# EAGLE board TCO v2 (EAGLE 7.2.0)
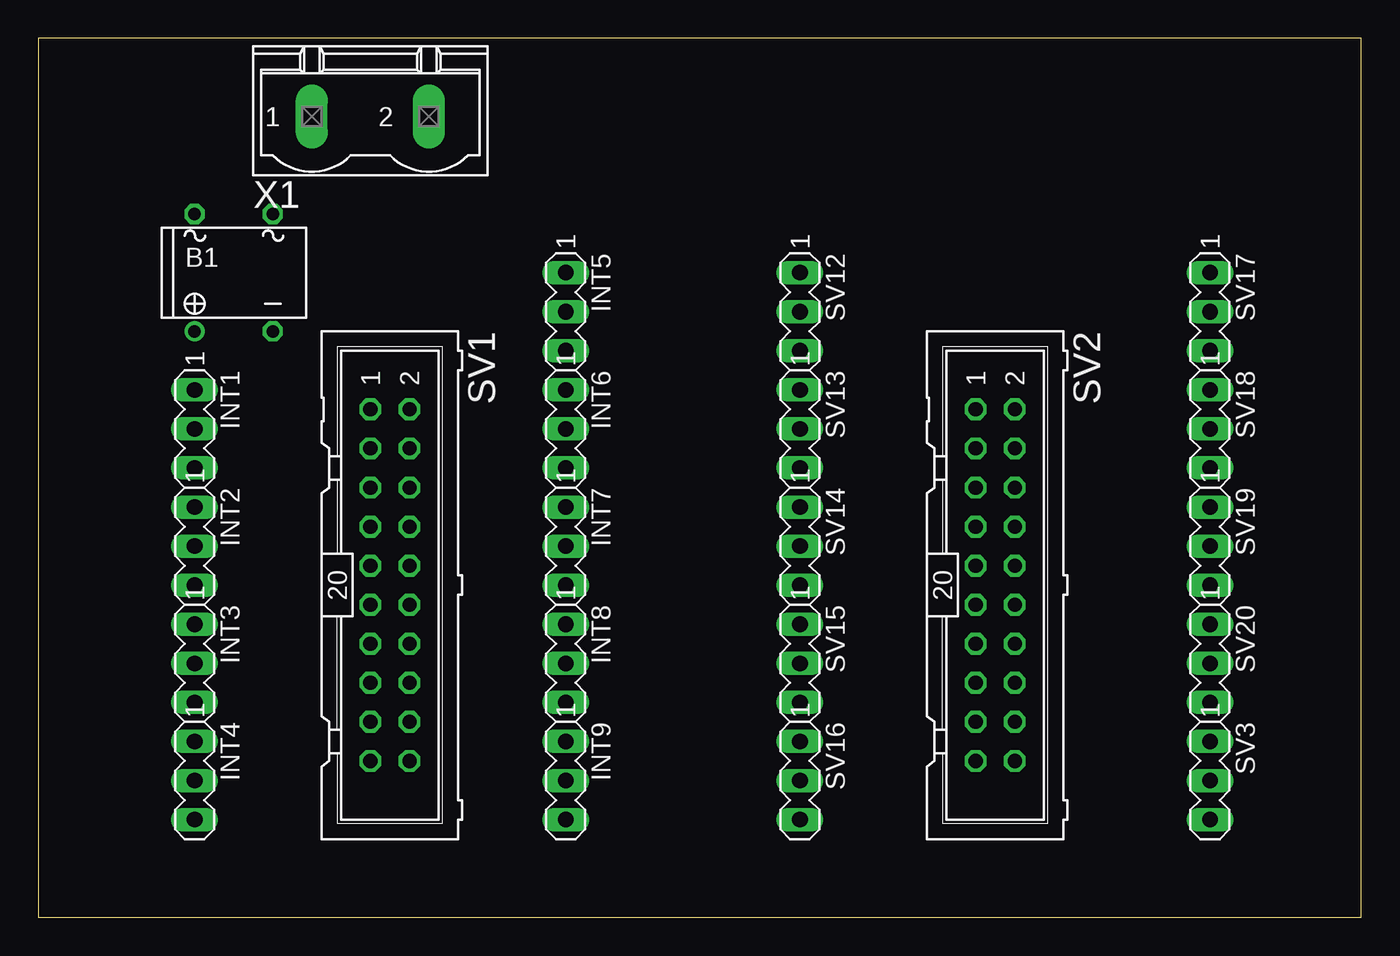
[diagram p0: board, top side]
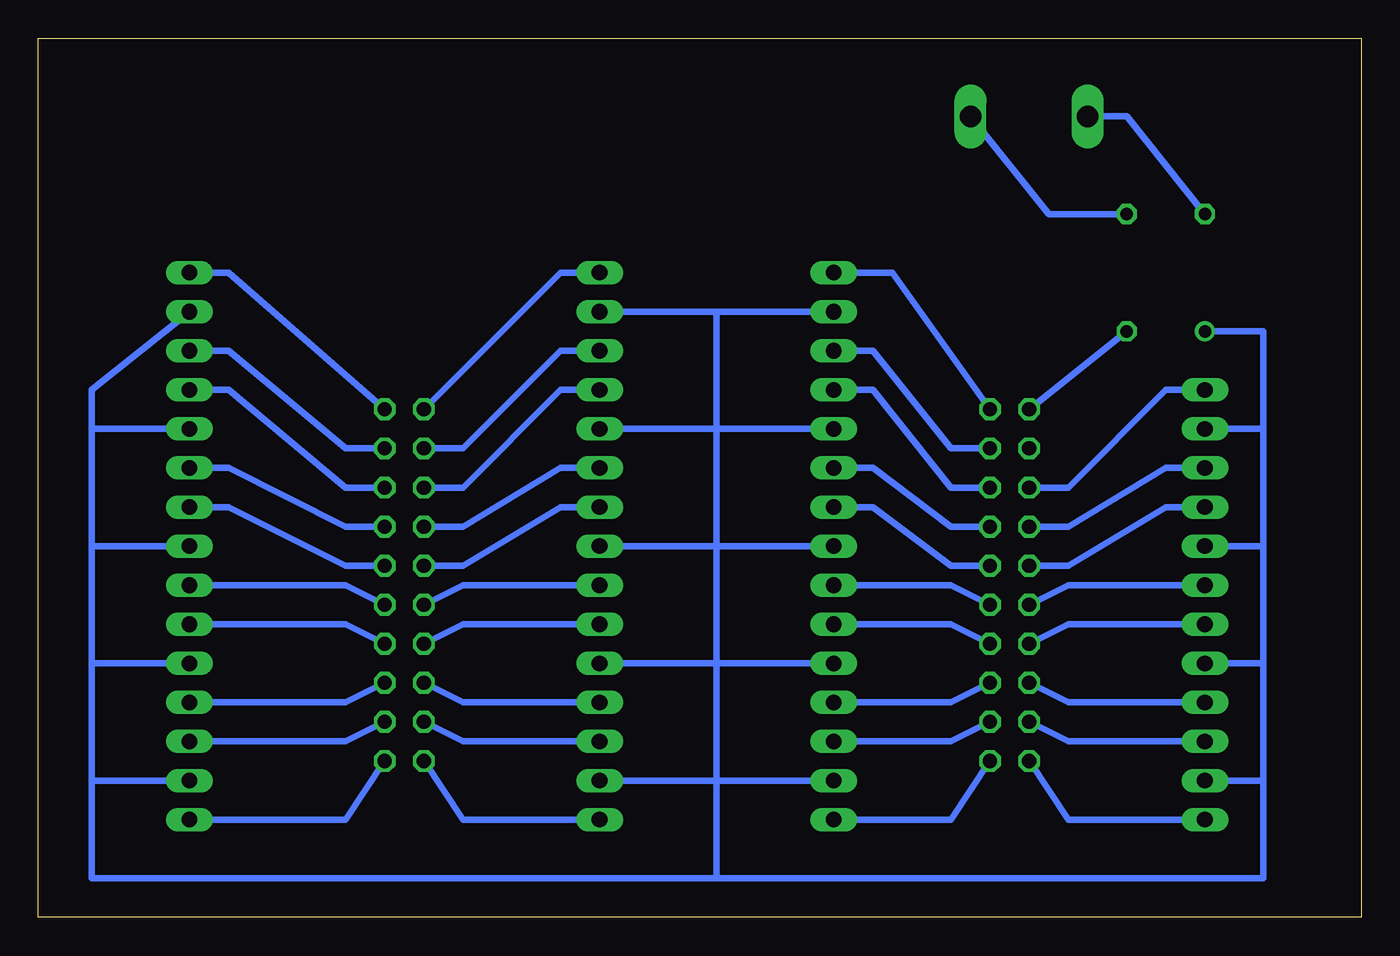
[diagram p1: board, bottom side, seen from below]

Size 86.03 x 57.14 mm. Coordinates in mm from the lower left corner, seen from the top.
Outline: 0,0 86.03,0 86.03,57.14 0,57.14 0,0
Copper layers (1*16): Top 0.035mm / dielectric 1.5mm / Bottom 0.035mm
Design rules "default": minimum track width 10mil, minimum drill 24mil, track to track 8mil, track to pad 8mil, pad to pad 8mil, via to via 8mil, smd to smd 8mil, copper to edge 40mil, drill to drill 8mil, minimum pad ring 10mil, minimum via ring 8mil, stop-mask expansion 4mil, vias tented up to drill 0mil, thermal gap 10mil

## Footprints (pad centres in the part's own frame; a part is rotated, then mirrored left to right if it is on the bottom)
B-DIL = drill 0.813: + -2.54,-3.81 | drill 0.813 octagon: - 2.54,-3.81; AC1 2.54,3.81; AC2 -2.54,3.81
MA03-1 = drill 1.016 long: 1 -2.54,0; 2 0,0; 3 2.54,0
ML20 = drill 0.914 octagon: 1 -11.43,-1.27; 2 -11.43,1.27; 3 -8.89,-1.27; 4 -8.89,1.27; 5 -6.35,-1.27; 6 -6.35,1.27; 7 -3.81,-1.27; 8 -3.81,1.27; 9 -1.27,-1.27; 10 -1.27,1.27; 11 1.27,-1.27; 12 1.27,1.27; 13 3.81,-1.27; 14 3.81,1.27; 15 6.35,-1.27; 16 6.35,1.27; 17 8.89,-1.27; 18 8.89,1.27; 19 11.43,-1.27; 20 11.43,1.27
GMSTBV2 = drill 1.397 long: 1 -3.81,0; 2 3.81,0

## Placement (x,y rotation side)
B1  [B-DIL]  12.7,41.91 0 top
INT1  [MA03-1]  10.16,31.75 270 top
INT2  [MA03-1]  10.16,24.13 270 top
INT3  [MA03-1]  10.16,16.51 270 top
INT4  [MA03-1]  10.16,8.89 270 top
INT5  [MA03-1]  34.29,39.37 270 top
INT6  [MA03-1]  34.29,31.75 270 top
INT7  [MA03-1]  34.29,24.13 270 top
INT8  [MA03-1]  34.29,16.51 270 top
INT9  [MA03-1]  34.29,8.89 270 top
SV1  [ML20]  22.86,21.59 270 top
SV2  [ML20]  62.23,21.59 270 top
SV3  [MA03-1]  76.2,8.89 270 top
SV12  [MA03-1]  49.53,39.37 270 top
SV13  [MA03-1]  49.53,31.75 270 top
SV14  [MA03-1]  49.53,24.13 270 top
SV15  [MA03-1]  49.53,16.51 270 top
SV16  [MA03-1]  49.53,8.89 270 top
SV17  [MA03-1]  76.2,39.37 270 top
SV18  [MA03-1]  76.2,31.75 270 top
SV19  [MA03-1]  76.2,24.13 270 top
SV20  [MA03-1]  76.2,16.51 270 top
X1  GMSTBV2  [GMSTBV2]  21.59,52.07 0 top

## Library data of the parts
B1 = rectifier
INT1-INT9 SV3 SV12-SV20 = con-lstb; OC_FARNELL: unknown; OC_NEWARK: unknown
SV1 SV2 = con-harting-ml; OC_FARNELL: unknown; OC_NEWARK: unknown
X1 = con-phoenix-762; MPN: GMSTBVA2,5/2-G-7,62; OC_FARNELL: 1793079; OC_NEWARK: 69R9520

## Nets
N$1: B1.AC1 X1.2
N$2: B1.AC2 X1.1
N$3: B1.- SV1.1
N$4: B1.+ INT1.2 INT2.2 INT3.2 INT4.2 INT5.2 INT6.2 INT7.2 INT8.2 INT9.2 SV3.2 SV12.2 SV13.2 SV14.2 SV15.2 SV16.2 SV17.2 SV18.2 SV19.2 SV20.2
N$5: INT1.1 SV1.5
N$6: INT1.3 SV1.7
N$7: INT2.1 SV1.9
N$8: INT2.3 SV1.11
N$9: INT3.1 SV1.13
N$10: INT3.3 SV1.15
N$11: INT4.1 SV1.17
N$12: INT4.3 SV1.19
N$13: INT5.1 SV1.2
N$14: INT5.3 SV1.4
N$15: INT6.1 SV1.6
N$16: INT6.3 SV1.8
N$17: INT7.1 SV1.10
N$18: INT7.3 SV1.12
N$19: INT8.1 SV1.14
N$20: INT8.3 SV1.16
N$21: INT9.1 SV1.18
N$22: INT9.3 SV1.20
N$23: SV2.1 SV12.1
N$24: SV2.3 SV12.3
N$25: SV2.5 SV13.1
N$26: SV2.7 SV13.3
N$27: SV2.9 SV14.1
N$28: SV2.11 SV14.3
N$29: SV2.13 SV15.1
N$30: SV2.15 SV15.3
N$31: SV2.17 SV16.1
N$32: SV2.19 SV16.3
N$33: SV2.2 SV17.1
N$34: SV2.4 SV17.3
N$35: SV2.6 SV18.1
N$36: SV2.8 SV18.3
N$37: SV2.10 SV19.1
N$38: SV2.12 SV19.3
N$39: SV2.14 SV20.1
N$40: SV2.16 SV20.3
N$41: SV2.18 SV3.1
N$42: SV2.20 SV3.3

## Tracks (layer width: path | path; a pad name or v marks a point on that pad's centre or on a via)
N$1
  Bottom 0.406: X1.2 20.32,45.72 B1.AC1
N$2
  Bottom 0.406: X1.1 15.24,52.07 B1.AC2
N$3
  Bottom 0.406: B1.- SV1.1
N$4
  Bottom 0.406: B1.+ 6.35,38.1 6.35,31.75 | INT1.2 6.35,31.75 | 6.35,31.75 6.35,24.13 | INT2.2 6.35,24.13 | 6.35,24.13 6.35,16.51 | INT3.2 6.35,16.51 | 6.35,16.51 6.35,8.89 | INT4.2 6.35,8.89 | INT9.2 41.91,8.89 | 41.91,8.89 41.91,2.54 | 41.91,2.54 6.35,2.54 6.35,8.89 | 41.91,8.89 SV16.2 | INT8.2 41.91,16.51 | SV15.2 41.91,16.51 | 41.91,16.51 41.91,8.89 | SV14.2 41.91,24.13 | 41.91,24.13 INT7.2 | INT6.2 41.91,31.75 | SV12.2 41.91,39.37 | 41.91,24.13 41.91,16.51 | SV3.2 82.55,8.89 | 41.91,2.54 82.55,2.54 82.55,8.89 | SV17.2 82.55,34.29 82.55,31.75 | 82.55,31.75 82.55,24.13 | 82.55,24.13 82.55,16.51 | 82.55,16.51 82.55,8.89 | SV20.2 82.55,16.51 | SV19.2 82.55,24.13 | SV18.2 82.55,31.75 | INT5.2 41.91,39.37 | 41.91,39.37 41.91,31.75 | SV13.2 41.91,31.75 | 41.91,31.75 41.91,24.13
N$5
  Bottom 0.406: INT1.1 12.7,34.29 19.05,27.94 SV1.5
N$6
  Bottom 0.406: INT1.3 12.7,29.21 19.05,25.4 SV1.7
N$7
  Bottom 0.406: INT2.1 12.7,26.67 19.05,22.86 SV1.9
N$8
  Bottom 0.406: INT2.3 19.05,21.59 SV1.11
N$9
  Bottom 0.406: INT3.1 19.05,19.05 SV1.13
N$10
  Bottom 0.406: INT3.3 19.05,13.97 SV1.15
N$11
  Bottom 0.406: INT4.1 19.05,11.43 SV1.17
N$12
  Bottom 0.406: INT4.3 19.05,6.35 SV1.19
N$13
  Bottom 0.406: SV1.2 30.48,41.91 INT5.1
N$14
  Bottom 0.406: INT5.3 31.75,36.83 26.67,30.48 SV1.4
N$15
  Bottom 0.406: INT6.1 31.75,34.29 26.67,27.94 SV1.6
N$16
  Bottom 0.406: INT6.3 31.75,29.21 26.67,25.4 SV1.8
N$17
  Bottom 0.406: INT7.1 31.75,26.67 26.67,22.86 SV1.10
N$18
  Bottom 0.406: INT7.3 26.67,21.59 SV1.12
N$19
  Bottom 0.406: INT8.1 26.67,19.05 SV1.14
N$20
  Bottom 0.406: INT8.3 26.67,13.97 SV1.16
N$21
  Bottom 0.406: INT9.1 26.67,11.43 SV1.18
N$22
  Bottom 0.406: INT9.3 26.67,6.35 SV1.20
N$23
  Bottom 0.406: SV12.1 52.07,41.91 SV2.1
N$24
  Bottom 0.406: SV12.3 52.07,36.83 58.42,30.48 SV2.3
N$25
  Bottom 0.406: SV13.1 52.07,34.29 58.42,27.94 SV2.5
N$26
  Bottom 0.406: SV13.3 52.07,29.21 58.42,25.4 SV2.7
N$27
  Bottom 0.406: SV14.1 52.07,26.67 58.42,22.86 SV2.9
N$28
  Bottom 0.406: SV14.3 58.42,21.59 SV2.11
N$29
  Bottom 0.406: SV15.1 58.42,19.05 SV2.13
N$30
  Bottom 0.406: SV15.3 58.42,13.97 SV2.15
N$31
  Bottom 0.406: SV16.1 58.42,11.43 SV2.17
N$32
  Bottom 0.406: SV2.19 58.42,6.35 SV16.3
N$33
  Bottom 0.406: SV17.1 73.66,41.91 SV2.2
N$34
  Bottom 0.406: SV17.3 73.66,36.83 66.04,30.48 SV2.4
N$35
  Bottom 0.406: SV18.1 73.66,34.29 66.04,27.94 SV2.6
N$36
  Bottom 0.406: SV18.3 73.66,29.21 66.04,25.4 SV2.8
N$37
  Bottom 0.406: SV2.10 66.04,22.86 73.66,26.67 SV19.1
N$38
  Bottom 0.406: SV2.12 66.04,21.59 SV19.3
N$39
  Bottom 0.406: SV20.1 66.04,19.05 SV2.14
N$40
  Bottom 0.406: SV20.3 66.04,13.97 SV2.16
N$41
  Bottom 0.406: SV3.1 66.04,11.43 SV2.18
N$42
  Bottom 0.406: SV3.3 66.04,6.35 SV2.20